# Altium PCB level_converter.PcbDoc
Units mm, origin at the board's own origin, x right, y up, seen from the top; angles counter-clockwise.
Board outline 26 x 26 mm, 2 copper layers (Top Layer, Bottom Layer); 11 components, 9 nets, 31 pads, 0 vias.
Unrouted connection lines stored in the file: 1.
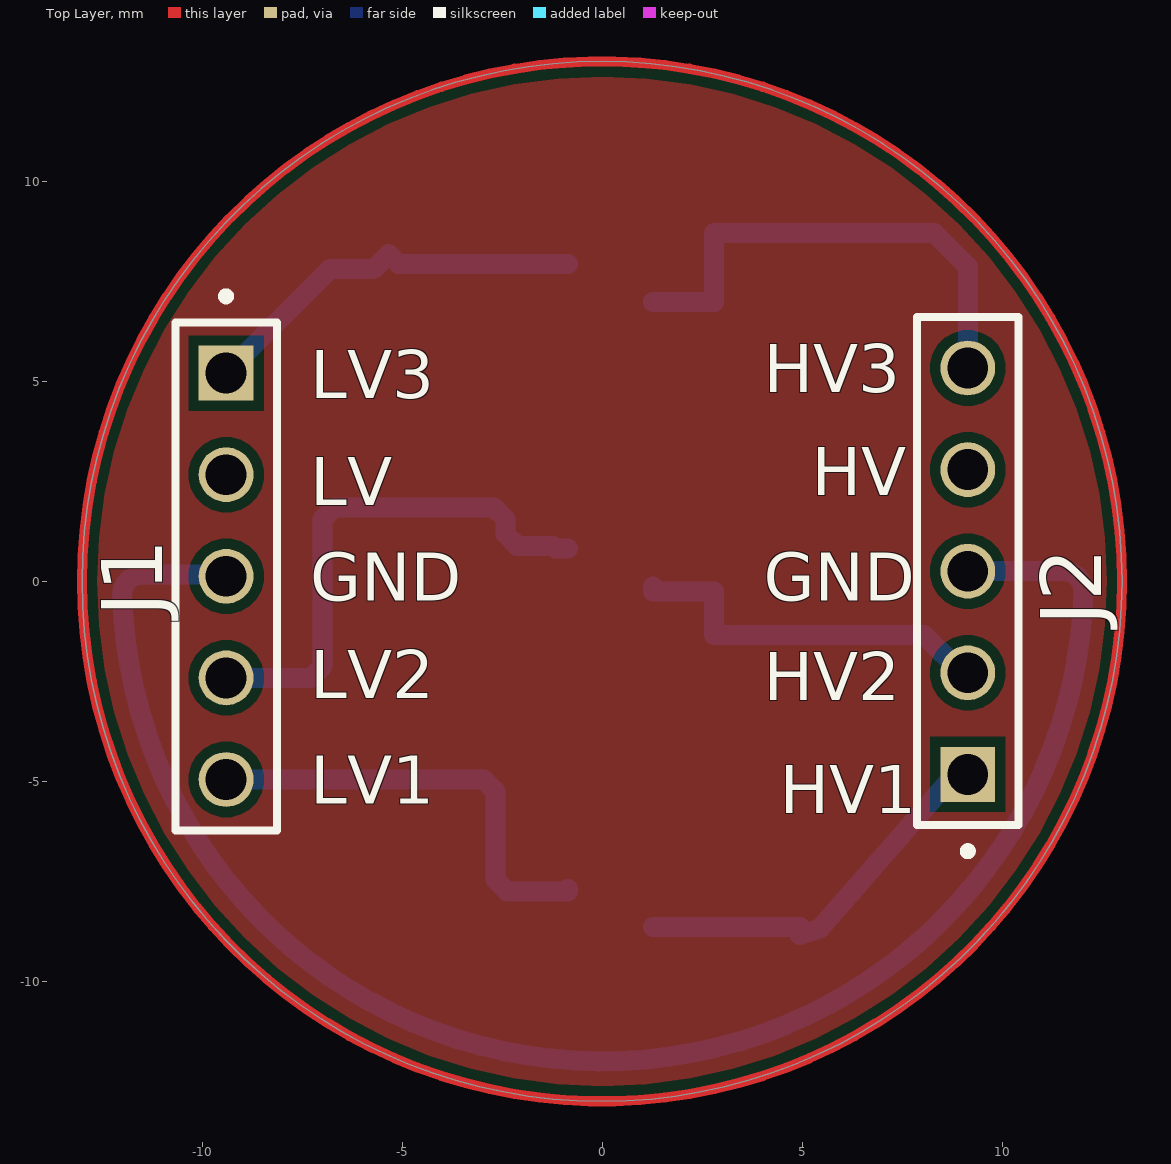
[diagram p0: Top Layer view]
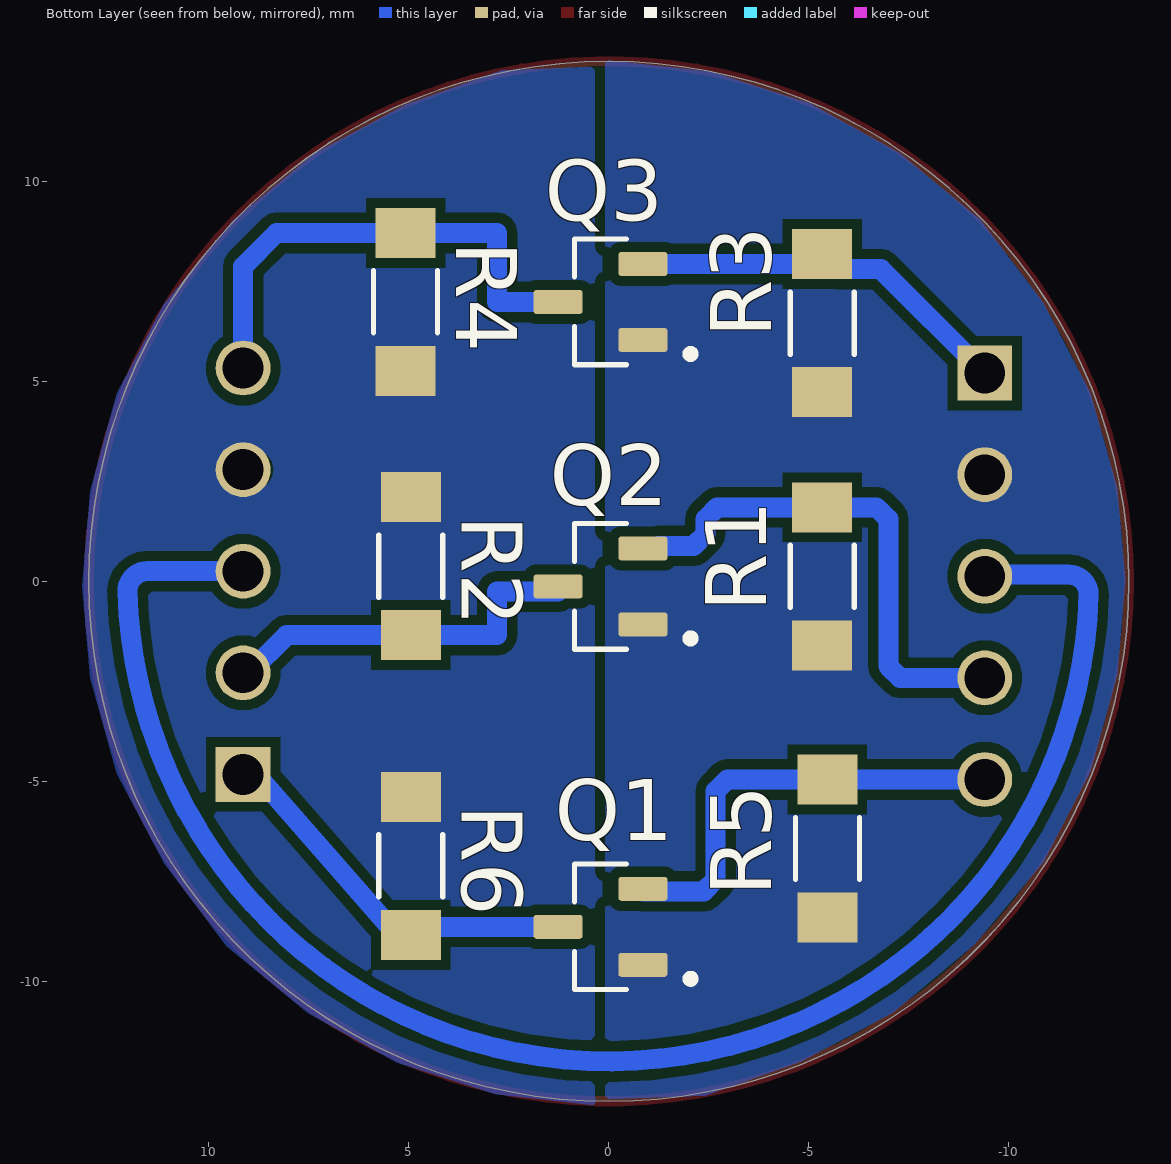
[diagram p1: Bottom Layer view, seen from below]

## Layer stack, top to bottom
Top Solder: solder mask 0.0102, Solder Resist, Dk 3.5
Top Layer: signal copper 0.0356
Dielectric 1: dielectric 0.32, FR-4, Dk 4.8
Bottom Layer: signal copper 0.0356
Bottom Solder: solder mask 0.0102, Solder Resist, Dk 3.5

## Board outline
0,-13 cw(c0,0) -13,0 cw(c0,0) 0,13 cw(c0,0) 13,0 cw(c0,0)

## Design rules (kind name [scope] priority, off if disabled: settings)
Clearance [All] p1: gap=0.254 ignorepadtopadclearanceinfootprint=FALSE
PolygonConnect [All] p1: connectstyle=Direct reliefconductorwidth=0.254 reliefentries=4 polygonreliefangle="90 Angle" airgapwidth=0.254
RoutingVias [All] p1: holewidth=0.711 width=1.27 viastyle="Through Hole" minholewidth=0.711 minwidth=1.27 maxholewidth=0.711 maxwidth=1.27
SolderMaskExpansion [All] p1: expansion=0.102 istentingtop=FALSE
Width [All] p1: maxlimit=0.5 minlimit=0.5 preferedwidth=0.5
30 further rules are at their usual default settings.

## Classes and differential pairs
component class level_converter: J1 J2 Q1 Q3 R1 R2 R3 R4 R5 R6

## Components (designator, comment, footprint, x,y, rotation, side; value= is the part's Value field where it differs from the comment)
J1 "High Voltage" SAMTEC_MTSW-105-22-S-S-260 -9.398,0.127 r90 top
J2 "Low Voltage" SAMTEC_MTSW-105-22-S-S-260 9.144,0.254 r270 top
Q1 "BSS138" SOT95P240X111-3N 0.21,-8.636 r0 bottom
Q2 "BSS138" SOT95P240X111-3N 0.21,-0.127 r0 bottom
Q3 "BSS138" SOT95P240X111-3N 0.21,6.985 r0 bottom
R1 "10k" RES_ERA8ARW103V -5.334,0.127 r270 bottom
R2 "10k" RES_ERA8ARW103V 4.953,0.381 r90 bottom
R3 "10k" RES_ERA8ARW103V -5.334,6.456 r270 bottom
R4 "10k" RES_ERA8ARW103V 5.08,6.985 r270 bottom
R5 "ERA8ARW103V" RES_ERA8ARW103V -5.461,-6.678 r270 bottom value=10k
R6 "ERA8ARW103V" RES_ERA8ARW103V 4.953,-7.112 r90 bottom value=10k

## Footprints (in the part's own frame and the unit in brackets; to place one, negate y for a bottom-side part, rotate by r counter-clockwise, add the part's x,y. Pads: shape width x height; smd on the part's side, far side on the other; paste and mask are expansions set on the pad)
RES_ERA8ARW103V [mm]
  rect 1.25x1.5 smd: 1(-1.725,0) 2(1.725,0)
  silkscreen extent -0.78,-0.8 0.78,0.8
SAMTEC_MTSW-105-22-S-S-260 [mm]
  rect 1.37x1.37 / inner round 1.37 / far side rect 1.37x1.37 hole 1.02: 01(5.08,0)
  round 1.37 hole 1.02: 02(2.54,0) 03(0,0) 04(-2.54,0) 05(-5.08,0)
  silkscreen extent -6.35,-1.27 7.1,1.27
SOT95P240X111-3N [mm]
  rrect25% 1.23x0.6 smd: 1(-1.06,0.95) 2(-1.06,-0.95) 3(1.06,0)
  silkscreen extent -2.35,-1.57 0.65,1.57, body extent -1.46,-1.2 1.46,1.2, height 0.65

## Part data
J1 J2: library part MTSW-105-22-S-S-260, Package=None, Availability=Unavailable, MP=MTSW-105-22-S-S-260, Price=None
Q1 Q2 Q3: "N-Channel 50V 220mA (Ta) 360mW (Ta) Surface Mount SOT-23-3", Package="SOT-23 ON Semiconductor", Availability=Good, Check_prices=https://www.snapeda.com/parts/BSS138/ON%20Semiconductor/view-part/4794929/?ref=eda, MF="ON Semiconductor", MP=BSS138, Price=None, Purchase-URL=https://pricing.snapeda.com/search/part/BSS138/?ref=eda, SnapEDA_Link=https://www.snapeda.com/parts/BSS138/ON%20Semiconductor/view-part/4794929/?ref=snap
R1 R2 R3 R4: library part ERA8ARW103V, Package=None, Availability=Unavailable, MP=ERA8ARW103V, Price=None
R5 R6: Package=None, Availability=Unavailable, MP=ERA8ARW103V, Price=None

## Nets (pads, with @x,y where several pads share a name; then routed paths per layer and width w, separated by ;. In a path a pad name is that pad's centre, name@x,y a point inside that pad or via, vN(x,y) a via of type N, cw(c..) or ccw(c..) an arc to the next point about the centre after c; other vN are vias at no path point)
GND: J1.03 J2.03 | length 43.2
  Bottom Layer w0.5: J1.03 ccw(c-9.495,0.03) -9.495,0.167 -9.521,0.167 -11.495,0.167 ccw(c-11.495,-0.333) -11.994,-0.346 ccw(c0.001,0) 8.487,-8.484 ccw(c-0.101,0.102) 12.037,-0.261 ccw(c11.537,-0.246) 11.539,0.254 J2.03
HV: J2.04 R2.2 R4.2 R6.2 | length 0.2
  Bottom Layer w0.5: J2.04@8.909,2.794 J2.04
HV1: J2.01 Q1.3 R6.1 | length 9.8
  Bottom Layer w0.5: Q1.3 4.953,-8.636 R6.1 5.453,-8.674 ccw(c5.087,-8.334) 5.463,-8.663 8.663,-5.005 cw(c9.04,-5.334) 8.709,-4.959 J2.01
HV2: J2.02 Q2.3 R2.1 | length 9.5
  Bottom Layer w0.5: Q2.3 1.27,-0.254 2.794,-0.254 2.794,-1.344 R2.1 8.057,-1.344 8.999,-2.286 J2.02
HV3: J2.05 Q3.3 R4.1 | length 12.5
  Bottom Layer w0.5: Q3.3 2.794,6.985 2.794,8.71 R4.1 8.308,8.71 9.144,7.874 J2.05
LV: J1.02 Q1.1 Q2.1 Q3.1 R1.2 R3.2 R5.2
LV1: J1.05 Q1.2 R5.1 | length 11.1
  Bottom Layer w0.5: J1.05 R5.1 -2.96,-4.953 -2.667,-5.246 -2.667,-7.454 -2.374,-7.747 -0.85,-7.747 Q1.2
LV2: J1.04 Q2.2 R1.1 | length 13.2
  Bottom Layer w0.5: J1.04 -7.278,-2.413 -6.985,-2.12 -6.985,1.559 -6.692,1.852 R1.1 ; R1.1@-5.459,1.852 -2.706,1.852 -2.413,1.559 -2.413,1.182 -2.12,0.889 -1.231,0.889 -1.165,0.823 Q2.2
LV3: J1.01 Q3.2 R3.1 | length 9.9
  Bottom Layer w0.5: J1.01 -6.799,7.806 -5.709,7.806 R3.1 -5.088,7.935 Q3.2
copper on no net: | length 81.7
  Top Layer w0.254: 13,0 ccw(c0,0) 13,0

## Polygon pours and split planes (outlines as drawn)
HV on Bottom Layer "HV_L02_P003" (solid, pour order 3): 9.552,-9.123 7.521,-10.799 5.288,-12.036 2.83,-12.82 0.172,-13.123 0.172,12.877 2.674,12.779 5.062,11.926 7.357,10.704 9.403,9.01 11.121,6.941 12.302,4.686 12.97,2.257 13.172,-0.123 12.97,-2.404 12.302,-4.798 11.121,-7.048
LV on Bottom Layer "LV_L02_P002" (solid, pour order 2): -9.288,9.045 -7.257,10.72 -5.024,11.958 -2.566,12.741 0.092,13.045 0.092,-12.955 -2.41,-12.857 -4.798,-12.005 -7.093,-10.783 -9.139,-9.089 -10.857,-7.019 -12.038,-4.765 -12.706,-2.335 -12.908,0.045 -12.706,2.325 -12.038,4.72 -10.857,6.97
no net on Top Layer "NONET_L01_P001" (solid, pour order 1): -9.42,-9.148 -7.389,-10.823 -5.156,-12.061 -2.698,-12.844 -0.04,-13.147 2.239,-12.844 4.553,-12.061 6.928,-11 8.799,-9.569 10.443,-7.742 11.769,-5.521 12.69,-2.824 13,0 12.69,2.824 11.769,5.521 10.352,7.947 8.267,10.033 5.991,11.537 3.135,12.616 0.304,12.996 -2.542,12.754 -4.93,11.902 -7.225,10.68 -9.271,8.986 -10.989,6.917 -12.17,4.662 -12.838,2.233 -13.04,-0.147 -12.838,-2.428 -12.17,-4.822 -10.989,-7.073

## Silkscreen, mask and mechanical layers (free items; w line width, h text height)
Top Overlay:
  text "HV3" at 4.039,4.733 h1.2
  text "LV3" at -7.296,4.576 h1.2
  text "HV" at 5.238,2.159 h1.2
  text "LV" at -7.296,1.909 h1.2
  text "GND" at -7.296,-0.479 h1.2
  text "GND" at 4.039,-0.483 h1.2
  text "LV2" at -7.296,-2.917 h1.2
  text "HV2" at 4.039,-2.972 h1.2
  text "LV1" at -7.296,-5.559 h1.2
  text "HV1" at 4.438,-5.791 h1.2